# EAGLE board VoltageLevelMeter1 (EAGLE 9.2.2)
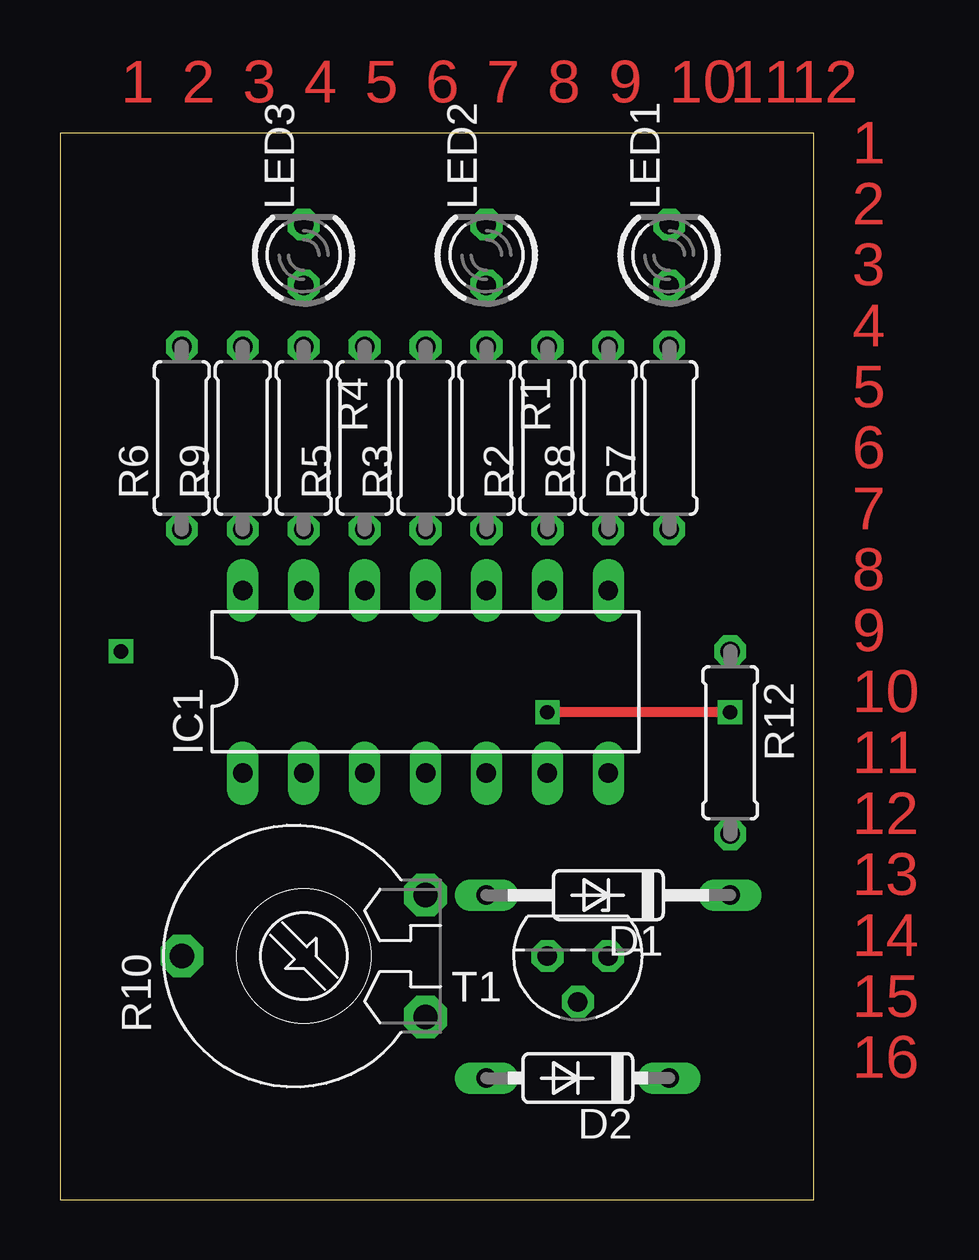
[diagram p0: board, top side]
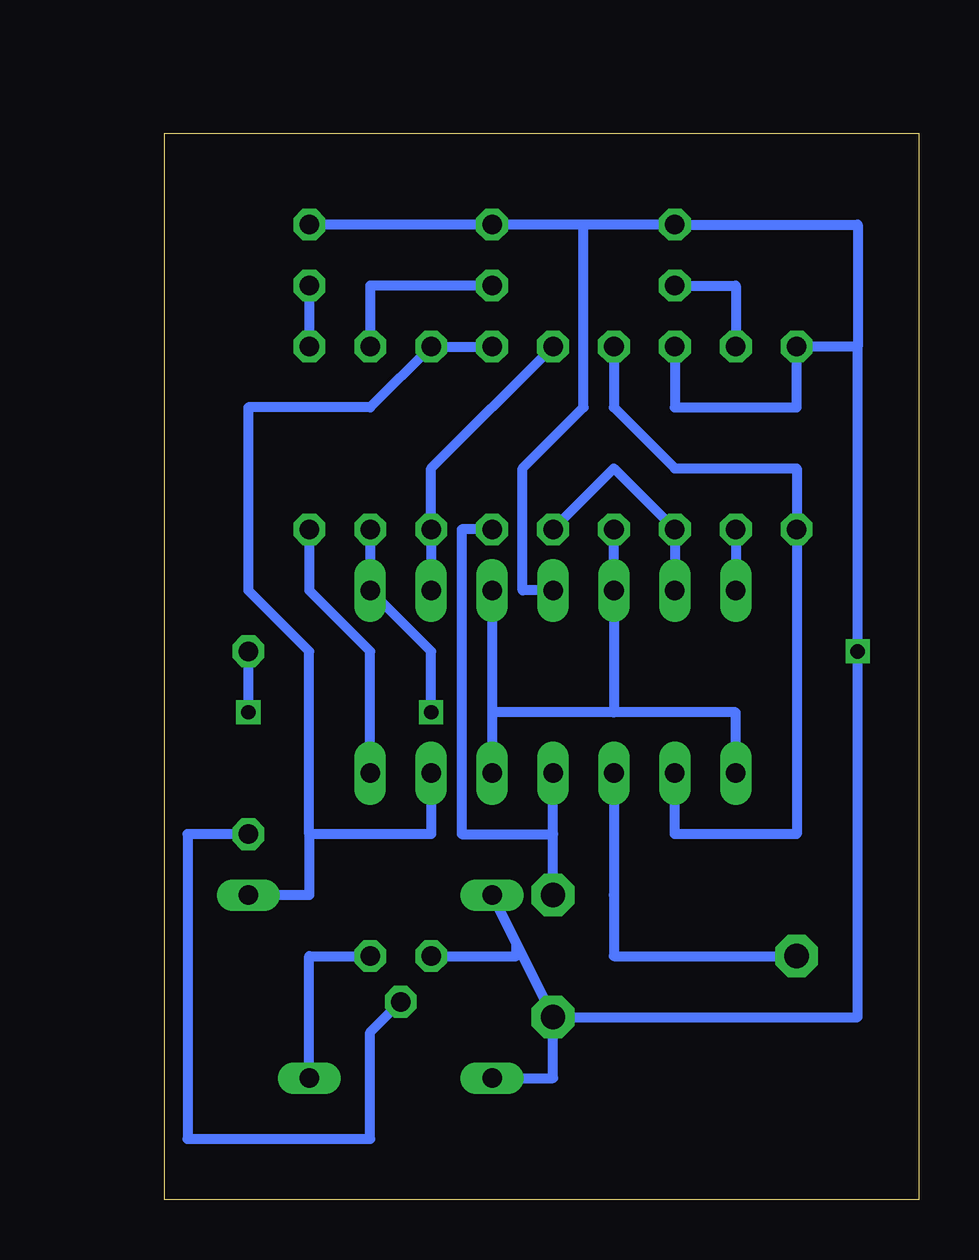
[diagram p1: board, bottom side, seen from below]

Size 31.42 x 44.44 mm. Coordinates in mm from the lower left corner, seen from the top.
Outline: 0,0 31.42,0 31.42,44.44 0,44.44 0,0
Copper layers (1*16): Top 0.035mm / dielectric 1.5mm / Bottom 0.035mm
Design rules "default": minimum track width 10mil, minimum drill 24mil, track to track 8mil, track to pad 8mil, pad to pad 8mil, via to via 8mil, smd to smd 8mil, copper to edge 40mil, drill to drill 8mil, minimum pad ring 10mil, minimum via ring 8mil, stop-mask expansion 4mil, vias tented up to drill 0mil, thermal gap 10mil
Net classes: 0 default: clearance 0.355 mm

## Footprints (pad centres in the part's own frame; a part is rotated, then mirrored left to right if it is on the bottom)
DO35Z10 = drill 0.813 long: A 5.08,0; C -5.08,0
DIODE_DO35-7 = drill 0.813 long: A 3.81,0; C -3.81,0
DIL14 = drill 0.813 long: 1 -7.62,-3.81; 2 -5.08,-3.81; 3 -2.54,-3.81; 4 0,-3.81; 5 2.54,-3.81; 6 5.08,-3.81; 7 7.62,-3.81; 8 7.62,3.81; 9 5.08,3.81; 10 2.54,3.81; 11 0,3.81; 12 -2.54,3.81; 13 -5.08,3.81; 14 -7.62,3.81
LED3MM = drill 0.813 octagon: A -1.27,0; K 1.27,0
0207/7 = drill 0.813 octagon: 1 -3.81,0; 2 3.81,0
PT-10 = drill 1.016 pad 1.778 octagon: 1 -2.54,-5.08; 2 2.54,-5.08; 3 0,5.08
TO92 = drill 0.813 octagon: 1 1.27,0; 2 0,1.905; 3 -1.27,0

## Placement (x,y rotation side)
D1  ZPD  [DO35Z10]  22.86,12.7 180 top
D2  1n4148  [DIODE_DO35-7]  21.59,5.08 180 top
DRILEGEND  [DRILEGEND]  0,-5.03 0 top  (outside the outline)
IC1  LM324N  [DIL14]  15.24,21.59 0 top
LED1  Green  [LED3MM]  25.4,39.37 90 top
LED2  Yelllow  [LED3MM]  17.78,39.37 90 top
LED3  Red  [LED3MM]  10.16,39.37 90 top
R1  4k7  [0207/7]  17.78,31.75 270 top
R2  8k2  [0207/7]  20.32,31.75 90 top
R3  6k8  [0207/7]  15.24,31.75 90 top
R4  100k  [0207/7]  10.16,31.75 270 top
R5  100k  [0207/7]  12.7,31.75 90 top
R6  100k  [0207/7]  5.08,31.75 90 top
R7  4k7  [0207/7]  25.4,31.75 90 top
R8  4k7  [0207/7]  22.86,31.75 90 top
R9  4k7  [0207/7]  7.62,31.75 90 top
R10  10k  [PT-10]  10.16,10.16 90 top
R12  4k7  [0207/7]  27.94,19.05 270 top
T1  BC237  [TO92]  21.59,10.16 180 top

## Library data of the parts
D1 = diode
D2 = eagle-ltspice; SPICEMODEL: diode; SPICEPREFIX: D
DRILEGEND = drilegend
IC1 = linear
LED1-LED3 = led
R1-R9 R12 = resistor
R10 = rcl
T1 = transistor

## Nets
N$1: D1.C IC1.6 R1.1 R2.2
N$2: IC1.9 R2.1 R3.2
N$3: IC1.13 R3.1 R4.2
N$4: IC1.14 R9.1
N$5: IC1.8 R8.1 R12.1
N$6: IC1.7 R7.1
N$7: IC1.1 IC1.5 IC1.10 IC1.12 R5.1
N$8: IC1.2 R5.2 R6.1
N$9: R12.2 T1.2
N$10: LED1.A R7.2
N$11: LED2.A R8.2
N$12: LED3.A R9.2
N$14: IC1.3 R10.3
RELAIS: D2.C T1.3
V+: IC1.4 R1.2 R10.2
V-: D1.A D2.A IC1.11 LED1.K LED2.K LED3.K R4.1 R6.2 R10.1 T1.1

## Tracks (layer width: path | path; a pad name or v marks a point on that pad's centre or on a via)
N$1
  Bottom 0.406: R1.1 R2.2 22.86,33.02 27.94,33.02 27.94,25.4 25.4,22.86 25.4,15.24 | 25.4,15.24 25.4,12.7 D1.C | IC1.6 20.32,15.24 25.4,15.24
N$2
  Bottom 0.406: R3.2 20.32,30.48 R2.1 IC1.9
N$3
  Bottom 0.406: IC1.13 R4.2 12.7,30.48 R3.1
N$4
  Bottom 0.406: R9.1 IC1.14
N$5  (via drill 0.6)
  Top 0.406: v27.94,20.32 v20.32,20.32
  Bottom 0.406: R8.1 IC1.8 20.32,22.86 v20.32,20.32 | R12.1 v27.94,20.32
N$6
  Bottom 0.406: R7.1 25.4,25.4 22.86,22.86 IC1.7
N$7
  Bottom 0.406: 17.78,20.32 IC1.5 | IC1.1 7.62,20.32 12.7,20.32 | 12.7,20.32 17.78,20.32 | IC1.10 17.78,20.32 | 12.7,20.32 IC1.12 R5.1
N$8
  Bottom 0.406: R5.2 12.7,33.02 10.16,30.48 5.08,30.48 R6.1 5.08,15.24 10.16,15.24 IC1.2
N$9
  Bottom 0.406: R12.2 30.48,15.24 30.48,2.54 22.86,2.54 22.86,6.99 T1.2
N$10
  Bottom 0.406: LED1.A R7.2
N$11
  Bottom 0.406: LED2.A 22.86,38.1 R8.2
N$12
  Bottom 0.406: LED3.A 7.62,38.1 R9.2
N$14
  Bottom 0.406: IC1.3 12.7,12.7 12.7,10.16 R10.3
RELAIS
  Bottom 0.406: D2.C 25.4,10.16 T1.3
V+
  Bottom 0.406: R10.2 15.24,15.24 | 15.24,15.24 IC1.4 | R1.2 19.05,27.94 19.05,15.24 15.24,15.24
V-  (via drill 0.6)
  Bottom 0.406: 13.97,40.64 LED3.K 2.54,40.64 2.54,35.56 | 13.97,40.64 LED2.K LED1.K | R4.1 10.16,33.02 5.08,33.02 R6.2 2.54,35.56 | R10.1 2.54,7.62 v2.54,22.86 2.54,35.56 | D1.A 16.76,10.67 | 16.76,10.67 R10.1 | IC1.11 16.51,25.4 16.51,30.48 13.97,33.02 13.97,40.64 | D2.A 15.24,5.08 R10.1 | T1.1 16.76,10.16 16.76,10.67

## Text on the board
Top: 1 | 2 | 3 | 4 | 5 | 6 | 7 | 8 | 9 | 10 | 11 | 12 | 1 | 2 | 3 | 4 | 5 | 6 | 7 | 8 | 9 | 10 | 11 | 12 | 13 | 14 | 15 | 16
DrillLegend: LAYER-STACK
DrillLegend_01-16: 01-16